# Altium PCB MainBoard.PcbDoc (part 3 of 3)
Units mil, origin at the board's own origin, x right, y up, seen from the top; angles counter-clockwise.
Board outline 11417.32 x 3858.27 mil, 2 copper layers (Top Layer, Bottom Layer); 222 components, 205 nets, 1642 pads, 0 vias.
Unrouted connection lines stored in the file: 802.
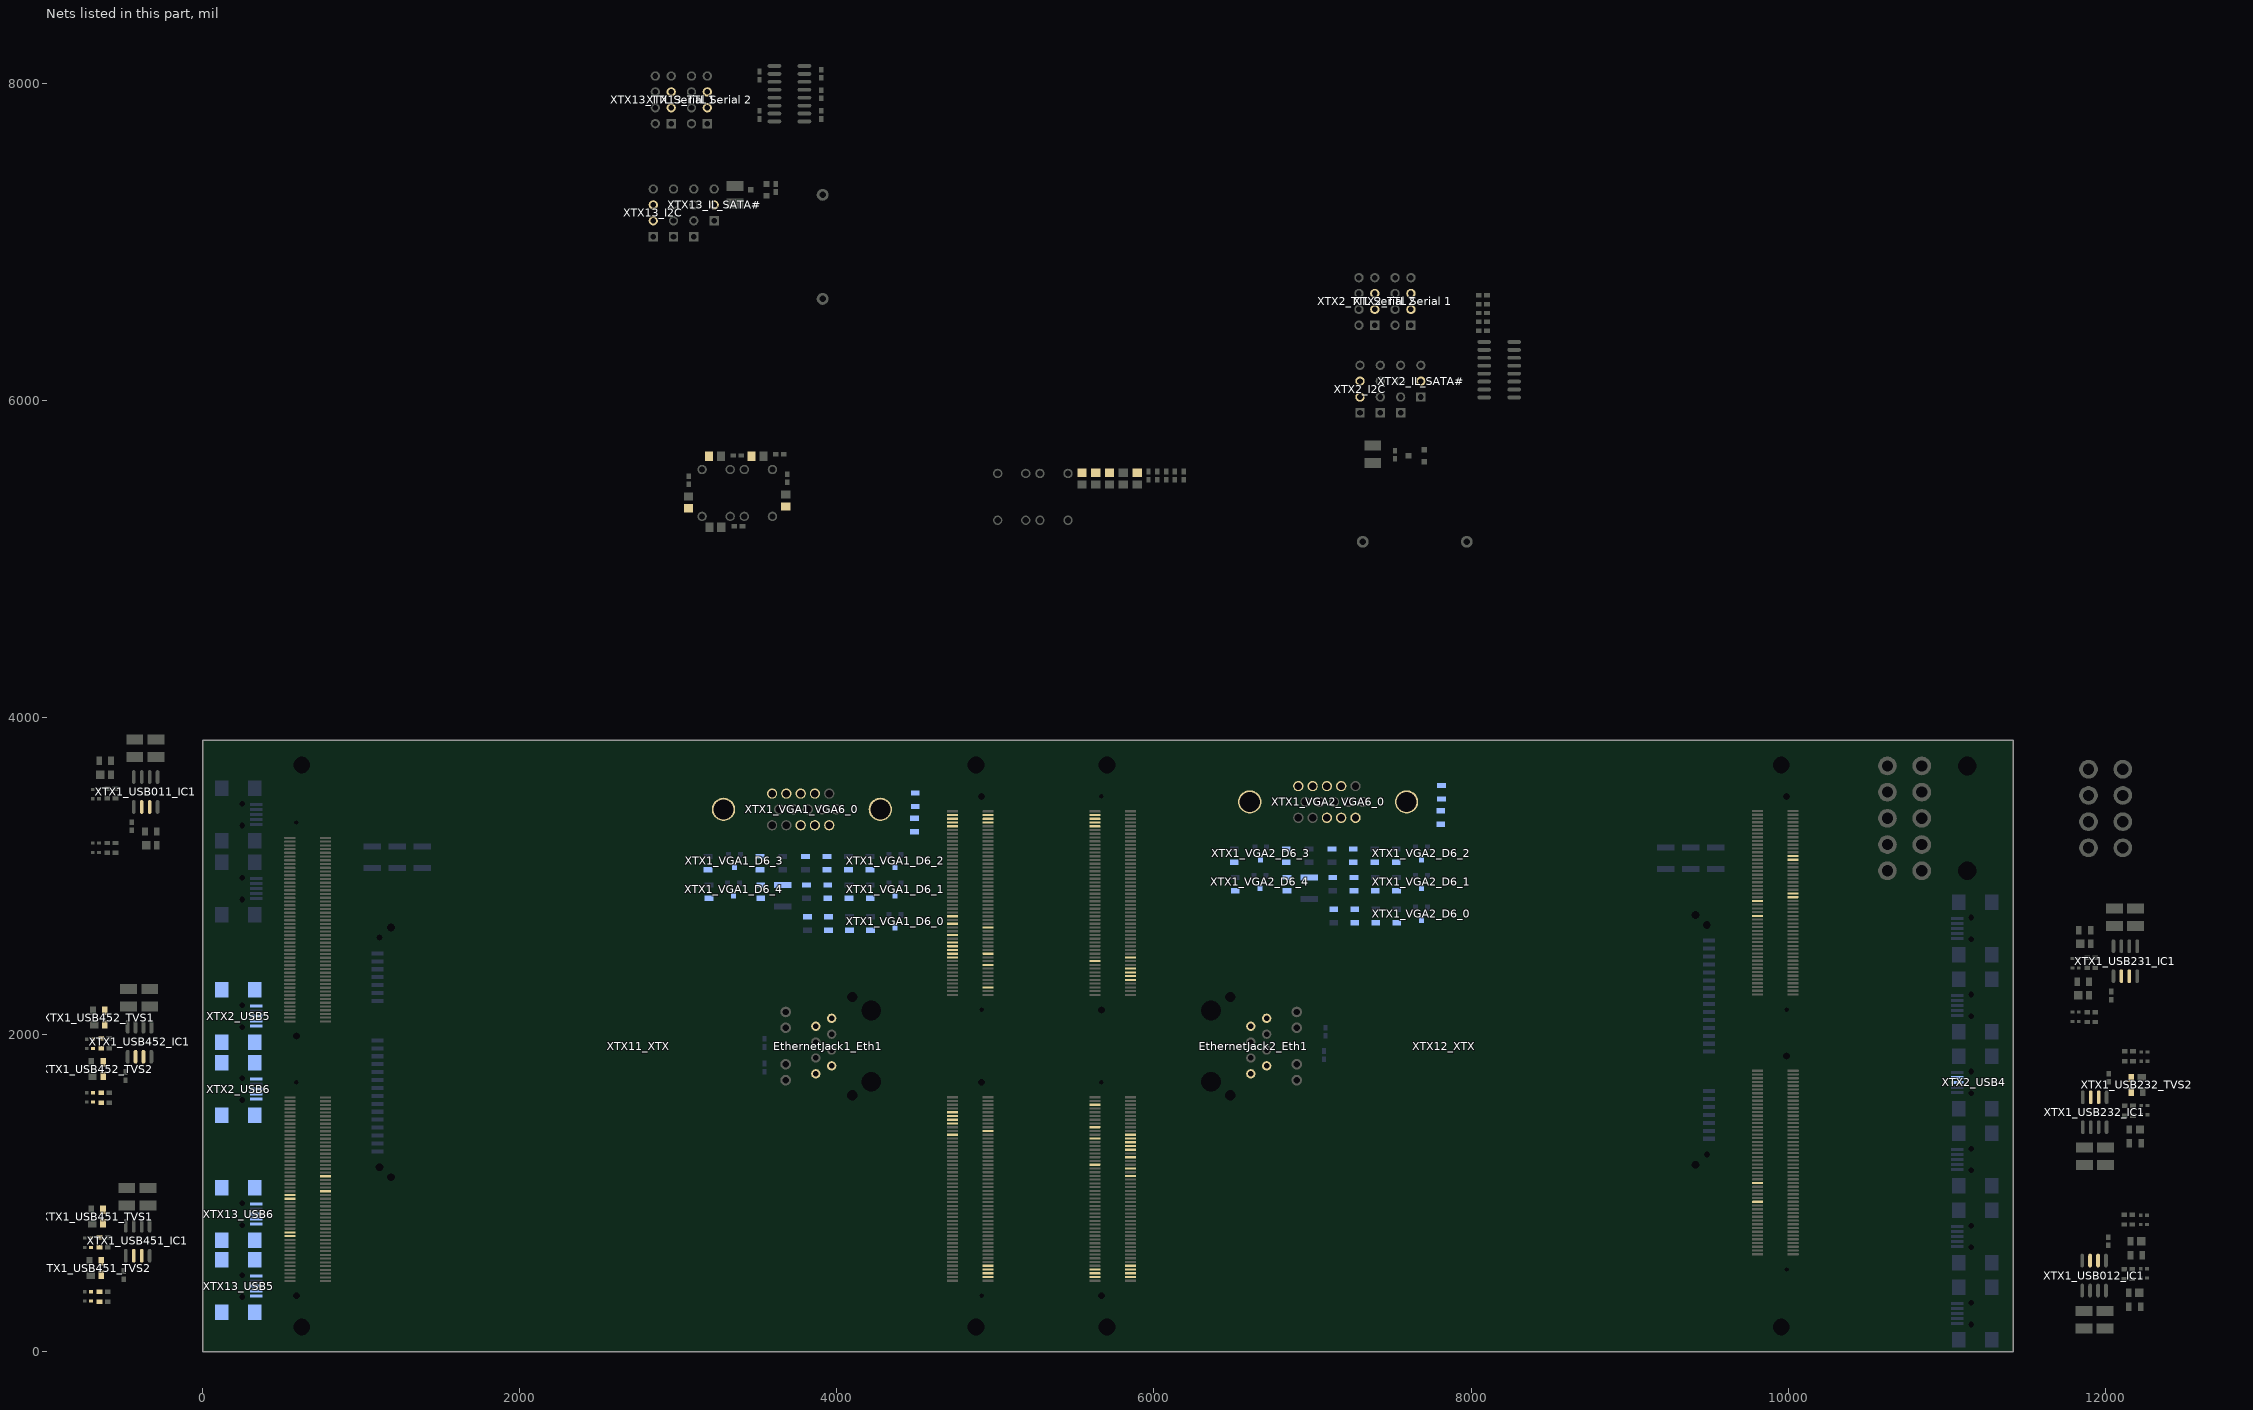
[diagram p3: the nets of this part, all layers, seen from the top]

## Nets (pads, with @x,y where several pads share a name; then routed paths per layer and width w, separated by ;. In a path a pad name is that pad's centre, name@x,y a point inside that pad or via, vN(x,y) a via of type N, cw(c..) or ccw(c..) an arc to the next point about the centre after c; other vN are vias at no path point) (continued)
XTX1_USB232_OUT_USBB_N: XTX1_USB232_TVS2.2 XTX2_USB4.2 XTX12_XTX.62
XTX1_USB232_OUT_USBB_P: XTX1_USB232_TVS2.3 XTX2_USB4.3 XTX12_XTX.72
XTX1_USB451_OUT_USBA_5V: XTX1_USB451_C7.2 XTX1_USB451_L1.2 XTX13_USB5.1
XTX1_USB451_OUT_USBA_GND: XTX1_USB451_C6.2 XTX1_USB451_L2.2 XTX13_USB5.5 XTX13_USB5.CGND
XTX1_USB451_OUT_USBA_N: XTX1_USB451_TVS1.2 XTX11_XTX.127 XTX13_USB5.2
XTX1_USB451_OUT_USBA_P: XTX1_USB451_TVS1.3 XTX11_XTX.125 XTX13_USB5.3
XTX1_USB451_OUT_USBB_5V: XTX1_USB451_C5.2 XTX1_USB451_L3.2 XTX13_USB6.1
XTX1_USB451_OUT_USBB_GND: XTX1_USB451_C4.2 XTX1_USB451_L4.2 XTX13_USB6.5 XTX13_USB6.CGND
XTX1_USB451_OUT_USBB_N: XTX1_USB451_TVS2.2 XTX11_XTX.147 XTX13_USB6.2
XTX1_USB451_OUT_USBB_P: XTX1_USB451_TVS2.3 XTX11_XTX.145 XTX13_USB6.3
XTX1_USB452_OUT_USBA_5V: XTX1_USB452_C7.2 XTX1_USB452_L1.2 XTX2_USB5.1
XTX1_USB452_OUT_USBA_GND: XTX1_USB452_C6.2 XTX1_USB452_L2.2 XTX2_USB5.5 XTX2_USB5.CGND
XTX1_USB452_OUT_USBA_N: XTX1_USB452_TVS1.2 XTX2_USB5.2 XTX12_XTX.127
XTX1_USB452_OUT_USBA_P: XTX1_USB452_TVS1.3 XTX2_USB5.3 XTX12_XTX.125
XTX1_USB452_OUT_USBB_5V: XTX1_USB452_C5.2 XTX1_USB452_L3.2 XTX2_USB6.1
XTX1_USB452_OUT_USBB_GND: XTX1_USB452_C4.2 XTX1_USB452_L4.2 XTX2_USB6.5 XTX2_USB6.CGND
XTX1_USB452_OUT_USBB_N: XTX1_USB452_TVS2.2 XTX2_USB6.2 XTX12_XTX.147
XTX1_USB452_OUT_USBB_P: XTX1_USB452_TVS2.3 XTX2_USB6.3 XTX12_XTX.145
XTX1_VGA1_BFILTERED: XTX1_VGA1_C6_5.1 XTX1_VGA1_FB6_2.2 XTX1_VGA1_VGA6_0.3
XTX1_VGA1_BIN: XTX1_VGA1_C6_2.1 XTX1_VGA1_D6_2.3 XTX1_VGA1_FB6_2.1 XTX1_VGA1_R6_2.2 XTX11_XTX.204
XTX1_VGA1_DDCKF: XTX1_VGA1_FB6_7.2 XTX1_VGA1_VGA6_0.15
XTX1_VGA1_DDCKIN: XTX1_VGA1_FB6_7.1 XTX11_XTX.208
XTX1_VGA1_DDDAF: XTX1_VGA1_FB6_4.2 XTX1_VGA1_VGA6_0.12
XTX1_VGA1_DDDAIN: XTX1_VGA1_FB6_4.1 XTX11_XTX.210
XTX1_VGA1_GFILTERED: XTX1_VGA1_C6_4.1 XTX1_VGA1_FB6_1.2 XTX1_VGA1_VGA6_0.2
XTX1_VGA1_GIN: XTX1_VGA1_C6_1.1 XTX1_VGA1_D6_1.3 XTX1_VGA1_FB6_1.1 XTX1_VGA1_R6_1.2 XTX11_XTX.206
XTX1_VGA1_HSYF: XTX1_VGA1_C6_6.2 XTX1_VGA1_D6_3.3 XTX1_VGA1_FB6_5.2 XTX1_VGA1_VGA6_0.13
XTX1_VGA1_HSYIN: XTX1_VGA1_FB6_5.1 XTX11_XTX.205
XTX1_VGA1_RFILTERED: XTX1_VGA1_C6_3.1 XTX1_VGA1_FB6_0.2 XTX1_VGA1_VGA6_0.1
XTX1_VGA1_RIN: XTX1_VGA1_C6_0.1 XTX1_VGA1_D6_0.3 XTX1_VGA1_FB6_0.1 XTX1_VGA1_R6_0.2 XTX11_XTX.203
XTX1_VGA1_VGA6CGND: XTX1_VGA1_R6_3.2 XTX1_VGA1_VGA6_0.CGND
XTX1_VGA1_VSYF: XTX1_VGA1_C6_7.2 XTX1_VGA1_D6_4.3 XTX1_VGA1_FB6_6.2 XTX1_VGA1_VGA6_0.14
XTX1_VGA1_VSYIN: XTX1_VGA1_FB6_6.1 XTX11_XTX.207
XTX1_VGA2_BFILTERED: XTX1_VGA2_C6_5.1 XTX1_VGA2_FB6_2.2 XTX1_VGA2_VGA6_0.3
XTX1_VGA2_BIN: XTX1_VGA2_C6_2.1 XTX1_VGA2_D6_2.3 XTX1_VGA2_FB6_2.1 XTX1_VGA2_R6_2.2 XTX12_XTX.204
XTX1_VGA2_DDCKF: XTX1_VGA2_FB6_7.2 XTX1_VGA2_VGA6_0.15
XTX1_VGA2_DDCKIN: XTX1_VGA2_FB6_7.1 XTX12_XTX.208
XTX1_VGA2_DDDAF: XTX1_VGA2_FB6_4.2 XTX1_VGA2_VGA6_0.12
XTX1_VGA2_DDDAIN: XTX1_VGA2_FB6_4.1 XTX12_XTX.210
XTX1_VGA2_GFILTERED: XTX1_VGA2_C6_4.1 XTX1_VGA2_FB6_1.2 XTX1_VGA2_VGA6_0.2
XTX1_VGA2_GIN: XTX1_VGA2_C6_1.1 XTX1_VGA2_D6_1.3 XTX1_VGA2_FB6_1.1 XTX1_VGA2_R6_1.2 XTX12_XTX.206
XTX1_VGA2_HSYF: XTX1_VGA2_C6_6.2 XTX1_VGA2_D6_3.3 XTX1_VGA2_FB6_5.2 XTX1_VGA2_VGA6_0.13
XTX1_VGA2_HSYIN: XTX1_VGA2_FB6_5.1 XTX12_XTX.205
XTX1_VGA2_RFILTERED: XTX1_VGA2_C6_3.1 XTX1_VGA2_FB6_0.2 XTX1_VGA2_VGA6_0.1
XTX1_VGA2_RIN: XTX1_VGA2_C6_0.1 XTX1_VGA2_D6_0.3 XTX1_VGA2_FB6_0.1 XTX1_VGA2_R6_0.2 XTX12_XTX.203
XTX1_VGA2_VGA6CGND: XTX1_VGA2_R6_3.2 XTX1_VGA2_VGA6_0.CGND
XTX1_VGA2_VSYF: XTX1_VGA2_C6_7.2 XTX1_VGA2_D6_4.3 XTX1_VGA2_FB6_6.2 XTX1_VGA2_VGA6_0.14
XTX1_VGA2_VSYIN: XTX1_VGA2_FB6_6.1 XTX12_XTX.207
XTX11_ETH_ACTLED#: "XTX1_Interface1_Eth Act.2" XTX11_XTX.312
XTX11_ETH_LILED#: "XTX1_Interface1_Eth Lil.2" XTX11_XTX.310
XTX11_ETH_RXD_N: EthernetJack1_Eth1.8 XTX11_XTX.391
XTX11_ETH_RXD_P: EthernetJack1_Eth1.7 XTX11_XTX.393
XTX11_ETH_SPEEDLED#: "XTX1_Interface1_Eth Spd.2" XTX11_XTX.314
XTX11_ETH_TXD_N: EthernetJack1_Eth1.2 XTX11_XTX.395
XTX11_ETH_TXD_P: EthernetJack1_Eth1.1 XTX11_XTX.397
XTX11_I2C_CLK: XTX11_XTX.316 XTX13_I2C.3
XTX11_I2C_DATA: XTX11_XTX.322 XTX13_I2C.2
XTX11_IL_SATA#: XTX11_XTX.158 XTX13_IL_SATA#.2
XTX11_PD0: XTX11_XTX.280
XTX11_PD1: XTX11_XTX.278
XTX11_PD2: XTX11_XTX.276
XTX11_PD3: XTX11_XTX.274
XTX11_PD4: XTX11_XTX.272
XTX11_PD5: XTX11_XTX.268
XTX11_PD6: XTX11_XTX.262
XTX11_PD7: XTX11_XTX.258
XTX11_RXD1: "XTX13_TTL Serial 1.3" XTX11_XTX.283
XTX11_RXD2: "XTX13_TTL Serial 2.3" XTX11_XTX.263
XTX11_SATALED#: XTX1_Interface1_SATA.2 XTX11_XTX.150
XTX11_TXD1: "XTX13_TTL Serial 1.5" XTX11_XTX.295
XTX11_TXD2: "XTX13_TTL Serial 2.5" XTX11_XTX.277
XTX11_USB_OVCR#: XTX1_USB011_IC1.2 XTX1_USB011_IC1.3 XTX1_USB231_IC1.2 XTX1_USB231_IC1.3 XTX1_USB451_IC1.2 XTX1_USB451_IC1.3 XTX11_XTX.319
XTX12_ETH_ACTLED#: "XTX1_Interface2_Eth Act.2" XTX12_XTX.312
XTX12_ETH_LILED#: "XTX1_Interface2_Eth Lil.2" XTX12_XTX.310
XTX12_ETH_RXD_N: EthernetJack2_Eth1.8 XTX12_XTX.391
XTX12_ETH_RXD_P: EthernetJack2_Eth1.7 XTX12_XTX.393
XTX12_ETH_SPEEDLED#: "XTX1_Interface2_Eth Spd.2" XTX12_XTX.314
XTX12_ETH_TXD_N: EthernetJack2_Eth1.2 XTX12_XTX.395
XTX12_ETH_TXD_P: EthernetJack2_Eth1.1 XTX12_XTX.397
XTX12_I2C_CLK: XTX2_I2C.3 XTX12_XTX.316
XTX12_I2C_DATA: XTX2_I2C.2 XTX12_XTX.322
XTX12_IL_SATA#: XTX2_IL_SATA#.2 XTX12_XTX.158
XTX12_PD0: XTX12_XTX.280
XTX12_PD1: XTX12_XTX.278
XTX12_PD2: XTX12_XTX.276
XTX12_PD3: XTX12_XTX.274
XTX12_PD4: XTX12_XTX.272
XTX12_PD5: XTX12_XTX.268
XTX12_PD6: XTX12_XTX.262
XTX12_PD7: XTX12_XTX.258
XTX12_RXD1: "XTX2_TTL Serial 1.3" XTX12_XTX.283
XTX12_RXD2: "XTX2_TTL Serial 2.3" XTX12_XTX.263
XTX12_SATALED#: XTX1_Interface2_SATA.2 XTX12_XTX.150
XTX12_TXD1: "XTX2_TTL Serial 1.5" XTX12_XTX.295
XTX12_TXD2: "XTX2_TTL Serial 2.5" XTX12_XTX.277
XTX12_USB_OVCR#: XTX1_USB012_IC1.2 XTX1_USB012_IC1.3 XTX1_USB232_IC1.2 XTX1_USB232_IC1.3 XTX1_USB452_IC1.2 XTX1_USB452_IC1.3 XTX12_XTX.319
pads on no net: "12V Out." "Power In." EthernetJack1_Eth1. EthernetJack1_Eth1.9 EthernetJack1_Eth1.10 EthernetJack1_Eth1.11 EthernetJack1_Eth1.12 EthernetJack2_Eth1. EthernetJack2_Eth1.9 EthernetJack2_Eth1.10 EthernetJack2_Eth1.11 EthernetJack2_Eth1.12 XTX1_SATA1_SATA4_0. XTX1_SATA1_SATA4_0.P11 XTX1_SATA2_SATA4_0. XTX1_SATA2_SATA4_0.P11 XTX1_VGA1_VGA6_0.4 XTX1_VGA1_VGA6_0.11 XTX1_VGA2_VGA6_0.4 XTX1_VGA2_VGA6_0.11 XTX2_USB1.4 XTX2_USB1.11 XTX2_USB1.12 XTX2_USB2.4 XTX2_USB2.11 XTX2_USB2.12 XTX2_USB3.4 XTX2_USB3.11 XTX2_USB3.12 XTX2_USB4.4 XTX2_USB4.11 XTX2_USB4.12 XTX2_USB5.4 XTX2_USB5.11 XTX2_USB5.12 XTX2_USB6.4 XTX2_USB6.11 XTX2_USB6.12 XTX11_D*1.2 XTX11_XTX.0 XTX11_XTX.3 XTX11_XTX.4 XTX11_XTX.7 XTX11_XTX.8 XTX11_XTX.9 XTX11_XTX.10 XTX11_XTX.11 XTX11_XTX.13 XTX11_XTX.14 XTX11_XTX.15 XTX11_XTX.17 XTX11_XTX.18 XTX11_XTX.21 XTX11_XTX.22 XTX11_XTX.23 XTX11_XTX.25 XTX11_XTX.26 XTX11_XTX.27 XTX11_XTX.28 XTX11_XTX.29 XTX11_XTX.30 XTX11_XTX.31 XTX11_XTX.32 XTX11_XTX.33 XTX11_XTX.34 XTX11_XTX.37 XTX11_XTX.38 XTX11_XTX.39 XTX11_XTX.40 XTX11_XTX.41 XTX11_XTX.42 XTX11_XTX.43 XTX11_XTX.44 XTX11_XTX.45 XTX11_XTX.46 XTX11_XTX.47 XTX11_XTX.48 XTX11_XTX.49 XTX11_XTX.50 XTX11_XTX.53 XTX11_XTX.54 XTX11_XTX.55 XTX11_XTX.56 XTX11_XTX.57 XTX11_XTX.59 XTX11_XTX.60 XTX11_XTX.61 XTX11_XTX.63 XTX11_XTX.64 XTX11_XTX.65 XTX11_XTX.69 XTX11_XTX.70 XTX11_XTX.71 XTX11_XTX.73 XTX11_XTX.74 XTX11_XTX.75 XTX11_XTX.77 XTX11_XTX.78 XTX11_XTX.79 XTX11_XTX.81 XTX11_XTX.82 XTX11_XTX.85 XTX11_XTX.86 XTX11_XTX.87 XTX11_XTX.89 XTX11_XTX.90 XTX11_XTX.91 XTX11_XTX.93 XTX11_XTX.94 XTX11_XTX.95 XTX11_XTX.96 XTX11_XTX.97 XTX11_XTX.98 XTX11_XTX.103 XTX11_XTX.105 XTX11_XTX.109 XTX11_XTX.111 XTX11_XTX.115 XTX11_XTX.116 XTX11_XTX.117 XTX11_XTX.118 XTX11_XTX.121 XTX11_XTX.122 XTX11_XTX.123 XTX11_XTX.124 XTX11_XTX.128 XTX11_XTX.130 XTX11_XTX.131 XTX11_XTX.132 XTX11_XTX.133 XTX11_XTX.134 XTX11_XTX.137 XTX11_XTX.138 XTX11_XTX.139 XTX11_XTX.140 XTX11_XTX.141 XTX11_XTX.143 XTX11_XTX.144 XTX11_XTX.146 XTX11_XTX.148 XTX11_XTX.149 XTX11_XTX.153 XTX11_XTX.154 XTX11_XTX.155 XTX11_XTX.156 XTX11_XTX.159 XTX11_XTX.160 XTX11_XTX.161 XTX11_XTX.162 XTX11_XTX.163 XTX11_XTX.164 XTX11_XTX.165 XTX11_XTX.166 XTX11_XTX.169 XTX11_XTX.170 XTX11_XTX.171 XTX11_XTX.172 XTX11_XTX.175 XTX11_XTX.176 XTX11_XTX.177 XTX11_XTX.178 XTX11_XTX.179 XTX11_XTX.181 XTX11_XTX.182 XTX11_XTX.185 XTX11_XTX.186 XTX11_XTX.187 XTX11_XTX.188 XTX11_XTX.189 XTX11_XTX.190 XTX11_XTX.191 XTX11_XTX.192 XTX11_XTX.193 XTX11_XTX.194 XTX11_XTX.195 XTX11_XTX.196 XTX11_XTX.197 XTX11_XTX.198 XTX11_XTX.209 XTX11_XTX.211 XTX11_XTX.212 XTX11_XTX.213 XTX11_XTX.214 XTX11_XTX.217 XTX11_XTX.218 XTX11_XTX.219 XTX11_XTX.220 XTX11_XTX.223 XTX11_XTX.224 XTX11_XTX.225 XTX11_XTX.226 XTX11_XTX.229 XTX11_XTX.230 XTX11_XTX.231 XTX11_XTX.232 XTX11_XTX.235 XTX11_XTX.236 XTX11_XTX.237 XTX11_XTX.238 XTX11_XTX.241 XTX11_XTX.242 XTX11_XTX.243 XTX11_XTX.244 XTX11_XTX.245 XTX11_XTX.246 XTX11_XTX.247 XTX11_XTX.248 XTX11_XTX.249 XTX11_XTX.250 XTX11_XTX.252 XTX11_XTX.255 XTX11_XTX.256 XTX11_XTX.257 XTX11_XTX.259 XTX11_XTX.260 XTX11_XTX.261 XTX11_XTX.264 XTX11_XTX.267 XTX11_XTX.269 XTX11_XTX.270 XTX11_XTX.271 XTX11_XTX.273 XTX11_XTX.275 XTX11_XTX.279 XTX11_XTX.284 XTX11_XTX.285 XTX11_XTX.286 XTX11_XTX.287 XTX11_XTX.288 XTX11_XTX.289 XTX11_XTX.290 XTX11_XTX.291 XTX11_XTX.292 XTX11_XTX.293 XTX11_XTX.294 XTX11_XTX.296 XTX11_XTX.297 XTX11_XTX.298 XTX11_XTX.305 XTX11_XTX.306 XTX11_XTX.309 XTX11_XTX.311 XTX11_XTX.313 XTX11_XTX.315 XTX11_XTX.320 XTX11_XTX.321 XTX11_XTX.323 XTX11_XTX.324 XTX11_XTX.325 XTX11_XTX.326 XTX11_XTX.327 XTX11_XTX.328 XTX11_XTX.329 XTX11_XTX.330 XTX11_XTX.331 XTX11_XTX.332 XTX11_XTX.335 XTX11_XTX.336 XTX11_XTX.337 XTX11_XTX.338 XTX11_XTX.339 XTX11_XTX.340 XTX11_XTX.341 XTX11_XTX.342 XTX11_XTX.343 XTX11_XTX.344 XTX11_XTX.345 XTX11_XTX.346 XTX11_XTX.347 XTX11_XTX.348 XTX11_XTX.351 XTX11_XTX.352 XTX11_XTX.353 XTX11_XTX.354 XTX11_XTX.355 XTX11_XTX.356 XTX11_XTX.357 XTX11_XTX.358 XTX11_XTX.359 XTX11_XTX.360 XTX11_XTX.361 XTX11_XTX.362 XTX11_XTX.363 XTX11_XTX.364 XTX11_XTX.367 XTX11_XTX.368 XTX11_XTX.369 XTX11_XTX.370 XTX11_XTX.371 XTX11_XTX.372 XTX11_XTX.373 XTX11_XTX.374 XTX11_XTX.375 XTX11_XTX.376 XTX11_XTX.377 XTX11_XTX.378 XTX11_XTX.379 XTX11_XTX.380 XTX11_XTX.383 XTX11_XTX.384 XTX11_XTX.385 XTX11_XTX.386 XTX11_XTX.387 XTX11_XTX.388 XTX11_XTX.389 XTX11_XTX.390 XTX11_XTX.392 XTX11_XTX.394 XTX11_XTX.396 XTX11_XTX.398 XTX12_D*1.2 XTX12_XTX.0 XTX12_XTX.3 XTX12_XTX.4 XTX12_XTX.7 XTX12_XTX.8 XTX12_XTX.9 XTX12_XTX.10 XTX12_XTX.11 XTX12_XTX.13 XTX12_XTX.14 XTX12_XTX.15 XTX12_XTX.17 XTX12_XTX.18 XTX12_XTX.21 XTX12_XTX.22 XTX12_XTX.23 XTX12_XTX.25 XTX12_XTX.26 XTX12_XTX.27 XTX12_XTX.28 XTX12_XTX.29 XTX12_XTX.30 XTX12_XTX.31 XTX12_XTX.32 XTX12_XTX.33 XTX12_XTX.34 XTX12_XTX.37 XTX12_XTX.38 XTX12_XTX.39 XTX12_XTX.40 XTX12_XTX.41 XTX12_XTX.42 XTX12_XTX.43 XTX12_XTX.44 XTX12_XTX.45 XTX12_XTX.46 XTX12_XTX.47 XTX12_XTX.48 XTX12_XTX.49 XTX12_XTX.50 XTX12_XTX.53 XTX12_XTX.54 XTX12_XTX.55 XTX12_XTX.56 XTX12_XTX.57 XTX12_XTX.59 XTX12_XTX.60 XTX12_XTX.61 XTX12_XTX.63 XTX12_XTX.64 XTX12_XTX.65 XTX12_XTX.69 XTX12_XTX.70 XTX12_XTX.71 XTX12_XTX.73 XTX12_XTX.74 XTX12_XTX.75 XTX12_XTX.77 XTX12_XTX.78 XTX12_XTX.79 XTX12_XTX.81 XTX12_XTX.82 XTX12_XTX.85 XTX12_XTX.86 XTX12_XTX.87 XTX12_XTX.89 XTX12_XTX.90 XTX12_XTX.91 XTX12_XTX.93 XTX12_XTX.94 XTX12_XTX.95 XTX12_XTX.96 XTX12_XTX.97 XTX12_XTX.98 XTX12_XTX.103 XTX12_XTX.105 XTX12_XTX.109 XTX12_XTX.111 XTX12_XTX.115 XTX12_XTX.116 XTX12_XTX.117 XTX12_XTX.118 XTX12_XTX.121 XTX12_XTX.122 XTX12_XTX.123 XTX12_XTX.124 XTX12_XTX.128 XTX12_XTX.130 XTX12_XTX.131 XTX12_XTX.132 XTX12_XTX.133 XTX12_XTX.134 XTX12_XTX.137 XTX12_XTX.138 XTX12_XTX.139 XTX12_XTX.140 XTX12_XTX.141 XTX12_XTX.143 XTX12_XTX.144 XTX12_XTX.146 XTX12_XTX.148 XTX12_XTX.149 XTX12_XTX.153 XTX12_XTX.154 XTX12_XTX.155 XTX12_XTX.156 XTX12_XTX.159 XTX12_XTX.160 XTX12_XTX.161 XTX12_XTX.162 XTX12_XTX.163 XTX12_XTX.164 XTX12_XTX.165 XTX12_XTX.166 XTX12_XTX.169 XTX12_XTX.170 XTX12_XTX.171 XTX12_XTX.172 XTX12_XTX.175 XTX12_XTX.176 XTX12_XTX.177 XTX12_XTX.178 XTX12_XTX.179 XTX12_XTX.181 XTX12_XTX.182 XTX12_XTX.185 XTX12_XTX.186 XTX12_XTX.187 XTX12_XTX.188 XTX12_XTX.189 XTX12_XTX.190 XTX12_XTX.191 XTX12_XTX.192 XTX12_XTX.193 XTX12_XTX.194 XTX12_XTX.195 XTX12_XTX.196 XTX12_XTX.197 XTX12_XTX.198 XTX12_XTX.209 XTX12_XTX.211 XTX12_XTX.212 XTX12_XTX.213 XTX12_XTX.214 XTX12_XTX.217 XTX12_XTX.218 XTX12_XTX.219 XTX12_XTX.220 XTX12_XTX.223 XTX12_XTX.224 XTX12_XTX.225 XTX12_XTX.226 XTX12_XTX.229 XTX12_XTX.230 XTX12_XTX.231 XTX12_XTX.232 XTX12_XTX.235 XTX12_XTX.236 XTX12_XTX.237 XTX12_XTX.238 XTX12_XTX.241 XTX12_XTX.242 XTX12_XTX.243 XTX12_XTX.244 XTX12_XTX.245 XTX12_XTX.246 XTX12_XTX.247 XTX12_XTX.248 XTX12_XTX.249 XTX12_XTX.250 XTX12_XTX.252 XTX12_XTX.255 XTX12_XTX.256 XTX12_XTX.257 XTX12_XTX.259 XTX12_XTX.260 XTX12_XTX.261 XTX12_XTX.264 XTX12_XTX.267 XTX12_XTX.269 XTX12_XTX.270 XTX12_XTX.271 XTX12_XTX.273 XTX12_XTX.275 XTX12_XTX.279 XTX12_XTX.284 XTX12_XTX.285 XTX12_XTX.286 XTX12_XTX.287 XTX12_XTX.288 XTX12_XTX.289 XTX12_XTX.290 XTX12_XTX.291 XTX12_XTX.292 XTX12_XTX.293 XTX12_XTX.294 XTX12_XTX.296 XTX12_XTX.297 XTX12_XTX.298 XTX12_XTX.305 XTX12_XTX.306 XTX12_XTX.309 XTX12_XTX.311 XTX12_XTX.313 XTX12_XTX.315 XTX12_XTX.320 XTX12_XTX.321 XTX12_XTX.323 XTX12_XTX.324 XTX12_XTX.325 XTX12_XTX.326 XTX12_XTX.327 XTX12_XTX.328 XTX12_XTX.329 XTX12_XTX.330 XTX12_XTX.331 XTX12_XTX.332 XTX12_XTX.335 XTX12_XTX.336 XTX12_XTX.337 XTX12_XTX.338 XTX12_XTX.339 XTX12_XTX.340 XTX12_XTX.341 XTX12_XTX.342 XTX12_XTX.343 XTX12_XTX.344 XTX12_XTX.345 XTX12_XTX.346 XTX12_XTX.347 XTX12_XTX.348 XTX12_XTX.351 XTX12_XTX.352 XTX12_XTX.353 XTX12_XTX.354 XTX12_XTX.355 XTX12_XTX.356 XTX12_XTX.357 XTX12_XTX.358 XTX12_XTX.359 XTX12_XTX.360 XTX12_XTX.361 XTX12_XTX.362 XTX12_XTX.363 XTX12_XTX.364 XTX12_XTX.367 XTX12_XTX.368 XTX12_XTX.369 XTX12_XTX.370 XTX12_XTX.371 XTX12_XTX.372 XTX12_XTX.373 XTX12_XTX.374 XTX12_XTX.375 XTX12_XTX.376 XTX12_XTX.377 XTX12_XTX.378 XTX12_XTX.379 XTX12_XTX.380 XTX12_XTX.383 XTX12_XTX.384 XTX12_XTX.385 XTX12_XTX.386 XTX12_XTX.387 XTX12_XTX.388 XTX12_XTX.389 XTX12_XTX.390 XTX12_XTX.392 XTX12_XTX.394 XTX12_XTX.396 XTX12_XTX.398 XTX13_USB1.4 XTX13_USB1.11 XTX13_USB1.12 XTX13_USB2.4 XTX13_USB2.11 XTX13_USB2.12 XTX13_USB3.4 XTX13_USB3.11 XTX13_USB3.12 XTX13_USB4.4 XTX13_USB4.11 XTX13_USB4.12 XTX13_USB5.4 XTX13_USB5.11 XTX13_USB5.12 XTX13_USB6.4 XTX13_USB6.11 XTX13_USB6.12

## Text inside footprints (layer, text, board x,y; h text height)
"XTX2_TTL Serial 1": Top Overlay "8" at 7540.31,6834.94 h50 r90; Top Overlay "7" at 7640.31,6834.94 h50 r90; Top Overlay "1" at 7640.31,6394.94 h50 r90; Top Overlay "2" at 7540.31,6374.94 h50 r90
"XTX2_TTL Serial 2": Top Overlay "8" at 7312.44,6834.94 h50 r90; Top Overlay "7" at 7412.44,6834.94 h50 r90; Top Overlay "1" at 7412.44,6394.94 h50 r90; Top Overlay "2" at 7312.44,6374.94 h50 r90
XTX11_XTX: Top Overlay "X4" at 4942.91,289.37 h78.74 r180; Top Overlay "X3" at 4942.91,2087.6 h78.74 r180; Top Overlay "X2" at 762.8,293.31 h78.74 r180; Top Overlay "X1" at 762.8,1931.1 h78.74 r180
XTX12_XTX: Top Overlay "X4" at 5638.06,3568.9 h78.74; Top Overlay "X3" at 5638.06,1770.67 h78.74; Top Overlay "X2" at 9818.17,3564.96 h78.74; Top Overlay "X1" at 9818.17,1927.17 h78.74
"XTX13_TTL Serial 1": Top Overlay "2" at 2875.31,7646.39 h50 r90; Top Overlay "1" at 2975.31,7666.39 h50 r90; Top Overlay "7" at 2975.31,8106.39 h50 r90; Top Overlay "8" at 2875.31,8106.39 h50 r90
"XTX13_TTL Serial 2": Top Overlay "2" at 3103.19,7646.39 h50 r90; Top Overlay "1" at 3203.19,7666.39 h50 r90; Top Overlay "7" at 3203.19,8106.39 h50 r90; Top Overlay "8" at 3103.19,8106.39 h50 r90